# EAGLE board Becca Sap Flow Sensor MOD (EAGLE 9.6.2)

Size 100 x 80 mm. Coordinates in mm from the lower left corner, seen from the top.
Outline: 0,0 100,0 100,80 0,80 0,0
Copper layers (1*16): Top 0.035mm / dielectric 0.15mm / Bottom 0.035mm
Design rules "default": minimum track width 6mil, minimum drill 0.35mm, track to track 6mil, track to pad 6mil, pad to pad 6mil, via to via 6mil, smd to smd 6mil, copper to edge 40mil, drill to drill 6mil, minimum pad ring 10mil, minimum via ring 8mil, stop-mask expansion 4mil, vias tented up to drill 0mil, thermal gap 10mil

## Footprints (pad centres in the part's own frame; a part is rotated, then mirrored left to right if it is on the bottom)
PANASONIC_C = smd 2.6 x 1.4: + 2.05,0; - -2.05,0
DIOM5027X250N = smd 2 x 1.55: 1 -2.1,0; 2 2.1,0
1935161 = drill 1.3 pad 1.95 square: 1 0,0 | drill 1.3 pad 1.95: 2 5,0
HDR2X1 = drill 1.016 square: 1 0,0 | drill 1.016: 2 2.54,0
R0805 = smd 1.3 x 1.5: 1 -0.95,0; 2 0.95,0
SOT223 = smd 1.219 x 2.235: 1 -2.311,-3.099; 2 0,-3.099; 3 2.311,-3.099 | smd 3.6 x 2.2: 4 0,3.099
3296W1102RLF = drill 0.71 pad 1.217 square: 1 0,0 | drill 0.71 pad 1.217: 2 0,2.54; 3 0,5.08

## Placement (x,y rotation side)
C1  220u, 25V  [PANASONIC_C]  8.89,30.48 0 top
D1  S1A  [DIOM5027X250N]  36.83,40.64 0 top
D2  S1A  [DIOM5027X250N]  30.48,53.34 0 top
J1  1935161  [1935161]  38.1,6.35 0 top
J2  1935161  [1935161]  25.4,6.35 0 top
J3  1935161  [1935161]  12.7,6.35 0 top
J4  1935161  [1935161]  25.4,31.75 0 top
JP1  JUMPER  [HDR2X1]  17.78,54.61 0 top
R1  12 Ohm, 5%  [R0805]  24.13,48.26 0 top
R2  47 Ohm, 5%  [R0805]  11.43,48.26 0 top
R3  100 Ohm, 5%  [R0805]  12.7,40.64 0 top
U1  V_REG_317SMD  [SOT223]  17.78,30.48 0 top
VR1  3296W-1-102RLF  [3296W1102RLF]  43.18,33.02 0 top

## Library data of the parts
C1 = rcl; SPICEPREFIX: C
D1 D2 = S1A; DESCRIPTION: Rectifier Diode Switching 50V 1A 1500ns 2-Pin SMA T/R; HEIGHT: 2.5mm; MANUFACTURER_NAME: Diotec; MANUFACTURER_PART_NUMBER: S1A; MOUSER_PART_NUMBER: 637-S1A; MOUSER_PRICE-STOCK: https://www.mouser.co.uk/ProductDetail/Diotec-Semiconductor/S1A?qs=OlC7AqGiEDlqVjQP70PTqA%3D%3D
J1-J4 = 1935161; DESCRIPTION: Phoenix Contact COMBICON PT PCB Terminal Block, 2 Way/Pole, Screw Terminals, 26 14 AWG Through Hole, Nylon; HEIGHT: 11.55mm; MANUFACTURER_NAME: Phoenix Contact; MANUFACTURER_PART_NUMBER: 1935161; MOUSER_PART_NUMBER: 651-1935161; MOUSER_PRICE-STOCK: https://www.mouser.co.uk/ProductDetail/Phoenix-Contact/1935161?qs=W3wJikR1%252BS6eKzfFl8Rbew%3D%3D
JP1 = 6P1_EVB
R1-R3 = rcl; SPICEPREFIX: R
U1 = SparkFun-IC-Power
VR1 = 3296W-1-102RLF; DESCRIPTION: 1 kOhms 0.5W, 1/2W PC Pins Through Hole Trimmer Potentiometer Cermet 25.0 Turn Top Adjustment; HEIGHT: 11.8mm; MANUFACTURER_NAME: Bourns; MANUFACTURER_PART_NUMBER: 3296W-1-102RLF; MOUSER_PART_NUMBER: 652-3296W-1-102RLF; MOUSER_PRICE-STOCK: https://www.mouser.co.uk/ProductDetail/Bourns/3296W-1-102RLF?qs=oM%2FE6%2FUWOpR5bwX1MfrWeA%3D%3D

## Nets
GND: C1.- J3.1 J4.2
N$1: D1.2 JP1.2
N$2: C1.+ D1.1 D2.1 U1.3
N$4: D2.2 R1.2 R2.2 U1.2
N$5: J2.1 J3.2
N$6: J1.1 J2.2
N$9: R3.2 U1.1 VR1.2
N$10: R2.1 VR1.1
N$11: J1.2 R1.1 R3.1 VR1.3
VCC: J4.1 JP1.1

## Tracks (layer width: path | path; a pad name or v marks a point on that pad's centre or on a via)
GND  (2 unrouted)
N$1  (1 unrouted)
N$2  (3 unrouted)
N$4  (3 unrouted)
N$5  (1 unrouted)
N$6  (1 unrouted)
N$9  (2 unrouted)
N$10  (1 unrouted)
N$11  (3 unrouted)
VCC  (1 unrouted)